# EAGLE board untitled (EAGLE 9.2.2)

Size 100 x 80 mm. Coordinates in mm from the lower left corner, seen from the top.
Outline: 0,0 100,0 100,80 0,80 0,0
Copper layers (1*16): Top 0.035mm / dielectric 1.5mm / Bottom 0.035mm
Design rules "default": minimum track width 6mil, minimum drill 0.35mm, track to track 6mil, track to pad 6mil, pad to pad 6mil, via to via 6mil, smd to smd 6mil, copper to edge 40mil, drill to drill 6mil, minimum pad ring 10mil, minimum via ring 8mil, stop-mask expansion 4mil, vias tented up to drill 0mil, thermal gap 10mil
Net classes: 0 default: width 1.27 mm, clearance 1.016 mm

## Footprints (pad centres in the part's own frame; a part is rotated, then mirrored left to right if it is on the bottom)
MA04-2 = drill 1.016 octagon: 1 -3.81,-1.27; 2 -3.81,1.27; 3 -1.27,-1.27; 4 -1.27,1.27; 5 1.27,-1.27; 6 1.27,1.27; 7 3.81,-1.27; 8 3.81,1.27
TO220H = drill 1.118 long: 1 -2.54,-10.16; 2 0,-10.16; 3 2.54,-10.16 | hole 3.302: 0,4.826
SPC4078 = drill 0.8 pad 2.184 long: 1 -3,0; 2 0,-4.8 | drill 1 pad 2.184 long: 3 3,0
1X02 = drill 1.016 long: 1 -1.27,0; 2 1.27,0
MA04-1 = drill 1.016 long: 1 -3.81,0; 2 -1.27,0; 3 1.27,0; 4 3.81,0

## Placement (x,y rotation side)
ESP  [MA04-2]  19.05,53.34 0 top
IC2  7805T  [TO220H]  27.94,34.29 0 top
IC3  LM1117T(H)-2.5  [TO220H]  41.91,34.29 0 top
J1  [SPC4078]  15.24,24.13 0 top
JP1  [1X02]  38.1,44.45 0 top
LCD  [MA04-1]  36.83,55.88 0 top
PIC  [MA04-2]  55.88,59.69 0 top

## Library data of the parts
ESP LCD PIC = con-lstb; OC_FARNELL: unknown; OC_NEWARK: unknown
IC2 = linear
IC3 = lm1117_10; MF: Texas Instruments; MPN: LM1117T-2.5; OC_FARNELL: 1798354; OC_NEWARK: 75R2090
J1 = con-jack; OC_FARNELL: unknown; OC_NEWARK: unknown
JP1 = pinhead

## Nets
GND: ESP.7 IC2.2 IC3.1 J1.1 LCD.4
N$1: IC2.1 J1.3
N$2: ESP.2 ESP.6 IC3.2 JP1.1
N$3: IC2.3 IC3.3 LCD.1 PIC.8
N$4: JP1.2 PIC.1
N$5: ESP.1 PIC.4
N$6: ESP.8 PIC.3
N$8: LCD.3 PIC.5

## Tracks (layer width: path | path; a pad name or v marks a point on that pad's centre or on a via)
GND  (4 unrouted)
N$1  (1 unrouted)
N$2  (3 unrouted)
N$3  (3 unrouted)
N$4  (1 unrouted)
N$5  (1 unrouted)
N$6  (1 unrouted)
N$8  (1 unrouted)